# EAGLE board Part2 (EAGLE 9.7.0)

Size 161.09 x 83.69 mm. Coordinates in mm from the lower left corner, seen from the top.
Outline: 0,0 161.09,0 161.09,83.69 0,83.69 0,0
Copper layers (1*16): Top 0.035mm / dielectric 1.5mm / Bottom 0.035mm
Design rules "default": minimum track width 6mil, minimum drill 0.35mm, track to track 6mil, track to pad 6mil, pad to pad 6mil, via to via 6mil, smd to smd 6mil, copper to edge 40mil, drill to drill 6mil, minimum pad ring 10mil, minimum via ring 8mil, stop-mask expansion 4mil, vias tented up to drill 0mil, thermal gap 10mil

## Footprints (pad centres in the part's own frame; a part is rotated, then mirrored left to right if it is on the bottom)
LEDRD254W60D565H860B_G = drill 0.981 pad 1.581: 1 -1.27,0; 2 1.27,0
ARDUINO-UNO-R3-SHIELD = drill 1.016 pad 1.88: 3.3V 24.13,-2.54; 5V 24.13,0; A0 24.13,12.7; A1 24.13,15.24; A2 24.13,17.78; A3 24.13,20.32; A4 24.13,22.86; A5 24.13,25.4; AREF -24.13,-13.97; D2 -24.13,20.32; D3 -24.13,17.78; D4 -24.13,15.24; D5 -24.13,12.7; D6 -24.13,10.16; D7 -24.13,7.62; D8 -24.13,3.81; D9 -24.13,1.27; D10 -24.13,-1.27; D11 -24.13,-3.81; D12 -24.13,-6.35; D13 -24.13,-8.89; GND@0 24.13,2.54; GND@1 24.13,5.08; GND@2 -24.13,-11.43; IOREF 24.13,-7.62; NC 24.13,-10.16; RES 24.13,-5.08; RX -24.13,25.4; SCL -24.13,-19.05; SDA -24.13,-16.51; TX -24.13,22.86; VIN 24.13,7.62

## Placement (x,y rotation side)
D2  GREEN  [LEDRD254W60D565H860B_G]  144.1,64 120 top
D3  GREEN  [LEDRD254W60D565H860B_G]  143.72,53.84 120 top
D4  GREEN  [LEDRD254W60D565H860B_G]  145.42,44.62 120 top
D5  GREEN  [LEDRD254W60D565H860B_G]  144.85,74.15 120 top
D6  GREEN  [LEDRD254W60D565H860B_G]  148.99,34.65 120 top
D7  GREEN  [LEDRD254W60D565H860B_G]  152.38,23.37 120 top
D8  GREEN  [LEDRD254W60D565H860B_G]  147.67,13.58 120 top
D9  GREEN  [LEDRD254W60D565H860B_G]  145.23,6.06 90 top
U1  ARDUINO-UNO-R3-SHIELD  [ARDUINO-UNO-R3-SHIELD]  29.84,35.81 180 top

## Library data of the parts
D2-D9 = Tinkercad; CATEGORY: Opto-Electronic; SUB-CATEGORY: LED; VALUE: LED_GREEN
U1 = Tinkercad

## Nets
U1_D6: D9.1 U1.D6
U1_D7: D8.1 U1.D7
U1_D8: D7.1 U1.D8
U1_D9: D6.1 U1.D9
U1_D10: D4.1 U1.D10
U1_D11: D3.1 U1.D11
U1_D12: D2.1 U1.D12
U1_D13: D5.1 U1.D13
U1_GND: D2.2 D3.2 D4.2 D5.2 D6.2 D7.2 D8.2 D9.2 U1.GND@0 U1.GND@1 U1.GND@2

## Tracks (layer width: path | path; a pad name or v marks a point on that pad's centre or on a via)
U1_D6  (1 unrouted)
U1_D7  (1 unrouted)
U1_D8  (1 unrouted)
U1_D9  (1 unrouted)
U1_D10  (1 unrouted)
U1_D11  (1 unrouted)
U1_D12  (1 unrouted)
U1_D13  (1 unrouted)
U1_GND  (10 unrouted)